# Altium PCB FPv3.1.PcbDoc
Units mil, origin at the board's own origin, x right, y up, seen from the top; angles counter-clockwise.
Board outline 1358 x 671 mil, 2 copper layers (Top Layer, Bottom Layer); 31 components, 75 nets, 237 pads, 44 vias.
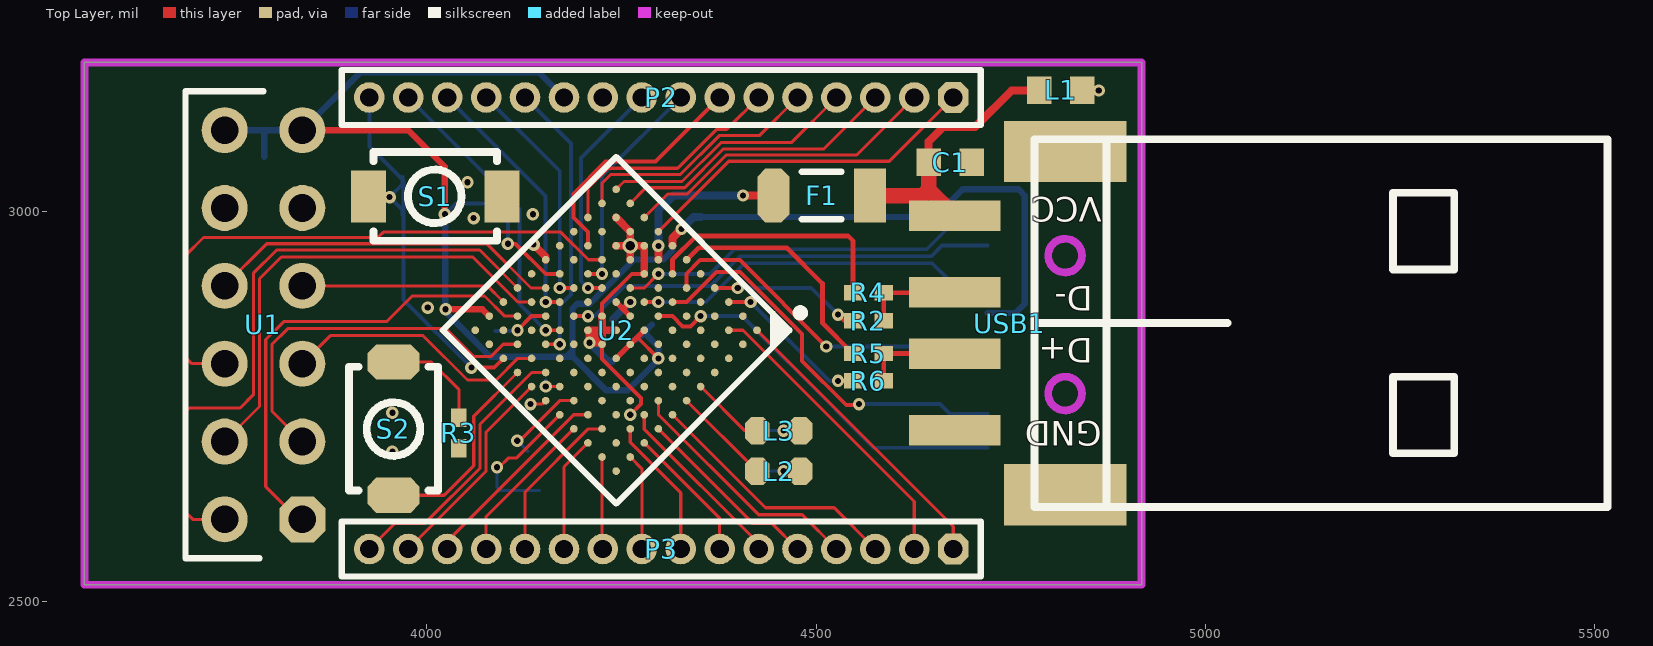
[diagram p0: Top Layer view]
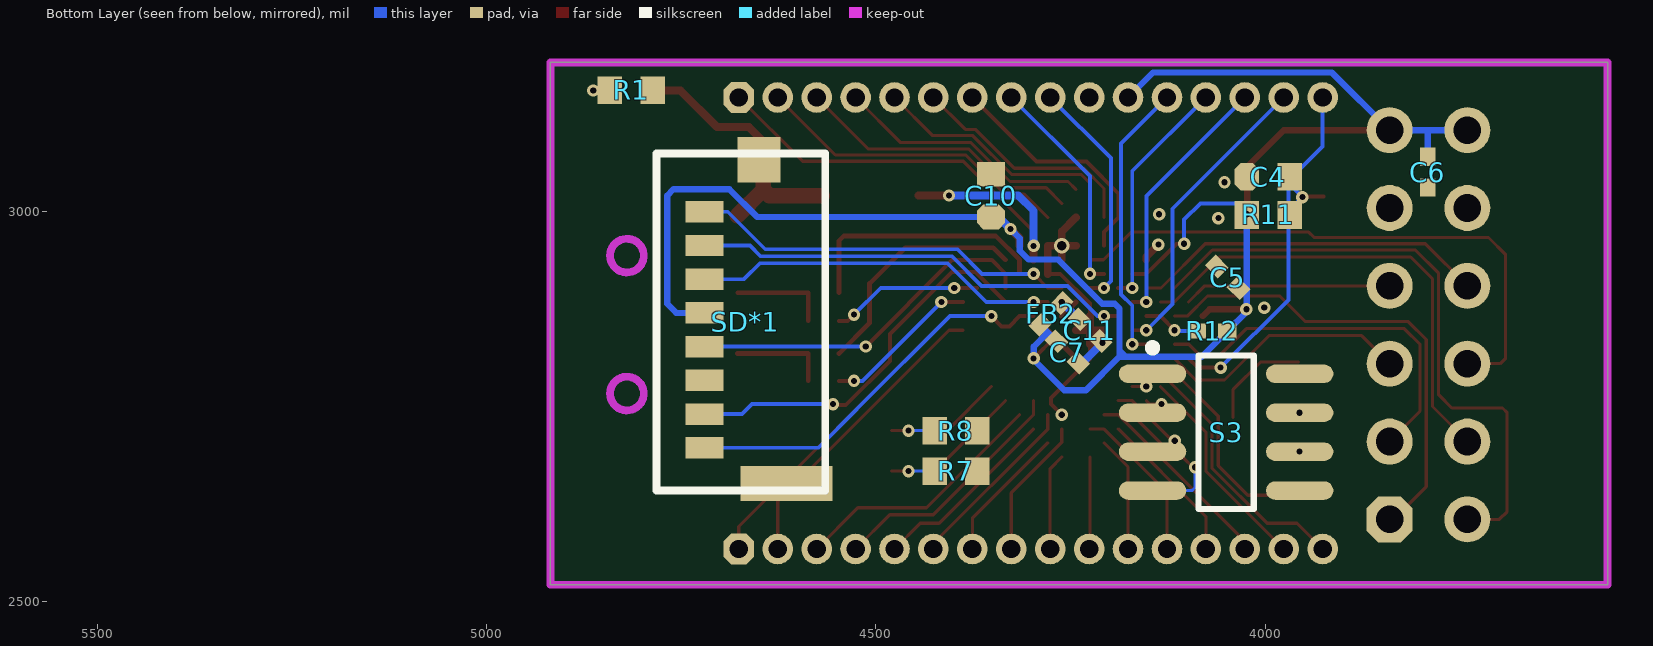
[diagram p1: Bottom Layer view, seen from below]

## Layer stack, top to bottom
Top Layer: signal copper 1.4
Dielectric: core 12.6, FR-4, Dk 4.8
Bottom Layer: signal copper 1.4

## Board outline
3560,2521 3560,3192 4918,3192 4918,2521

## Design rules (kind name [scope] priority, off if disabled: settings)
Clearance [All] p1: gap=4
DiffPairsRouting [All] p1: maxlimit=10 minlimit=10 mostfreqgap=10 maxuncoupledlength=500
PolygonConnect [All] p1: connectstyle=Direct reliefconductorwidth=10 reliefentries=4 polygonreliefangle="90 Angle" airgapwidth=10
RoutingVias [All] p1: holewidth=28 width=50 viastyle="Through Hole" minholewidth=28 minwidth=50 maxholewidth=28 maxwidth=50
SolderMaskExpansion [All] p1: expansion=4
Width [All] p1: maxlimit=50 minlimit=4 preferedwidth=10 minimp=50.000000 maximp=50.000000 favimp=50.000000
27 further rules are at their usual default settings.

## Classes and differential pairs
differential pair USB1D: +USB1D_P -USB1D_N

## Components (designator, comment, footprint, x,y, rotation, side; value= is the part's Value field where it differs from the comment)
C1 "Cap" 1608[0603]#1 4672,3064 r180 top
C4 "Cap" 1608[0603]#2 3996,3045 r180 bottom
C5 "Cap" 0402 4048,2916 r225 bottom
C6 "Cap" 0402 3791,3051 r90 bottom
C7 "Cap" 0402 4254,2820 r45 bottom
C10 "Cap" 1608[0603]#3 4352,3021 r270 bottom
C11 "Cap" 0402 4224.9,2848 r225 bottom
F1 "300-500mA" 1206(2) 4507,3021 r180 top
FB2 "Inductor" 0402 4275,2869 r135 bottom
L1 "LED" 1608[0603]#1 4814,3156 r0 top
L2 "LED" 1608[0603]#4 4452,2667 r0 top
L3 "LED" 1608[0603]#4 4452,2719 r0 top
P2 "MHDR1X16" MHDR1X16 4676,3147 r180 top
P3 "MHDR1X16" MHDR1X16 4676,2567 r180 top
R1 "Res" 1608[0603]#1 4814,3156 r0 bottom
R2 "Res" 0402 4567,2860 r0 top
R3 "Res" 0402 4041,2716 r270 top
R4 "Res" 0402 4567,2896 r0 top
R5 "Res" 0402 4567,2818 r0 top
R6 "Res" 0402 4567,2783 r180 top
R7 "Res" 1608[0603]#1 4397,2667 r0 bottom
R8 "Res" 1608[0603]#1 4397,2719 r0 bottom
R11 "Res" 1608[0603]#1 3996,2996 r180 bottom
R12 "Res" 0402 4068,2847 r0 bottom
S1 "SW-PB" "key 3*4*2"#1 4010,3020 r180 top
S2 "SW-PB" "key 3*4*2"#2 3957,2721 r270 top (schematic designator S1)
S3 "SW SMT-4" SO8_N 4050,2717 r180 bottom
SD*1 "TF_card" TF卡座(短体) 4565,2642 r90 bottom
U1 "Header 6X2" HDR2X6 3840,2605 r90 top
U2 "MK64FX512VDC" BGA121C65P11X11_800X800X50 4243,2848 r225 top
USB1 "USB_5line" USB-4-A-SMT-A 4678,2995 r180 top

## Footprints (in the part's own frame and the unit in brackets; to place one, negate y for a bottom-side part, rotate by r counter-clockwise, add the part's x,y. Pads: shape width x height; smd on the part's side, far side on the other; paste and mask are expansions set on the pad)
0402 [mm] "Chip Capacitor, Body 1.0x0.5mm, IPC High Density"
  rect 0.6x0.5 smd: 1(-0.5,0) 2(0.5,0)
  body extent -0.55,-0.3 0.55,0.3, height 1.3
1206(2) [mm]
  rect 1.05x1.75 smd: 1(-1.575,0)
  oct 1.05x1.75 smd: 2(1.575,0)
  silkscreen extent -0.65,-0.77 0.65,0.77, body extent -1.6,-0.8 1.6,0.8, height 1.6
1608[0603]#1 [mm] "Chip Capacitor, Body 1.6x0.8mm, IPC High Density"
  rect 0.8x0.9 smd: 1(-0.7,0) 2(0.7,0)
  body extent -0.87,-0.48 0.87,0.48, height 1.3
1608[0603]#2 [mm] "Chip Capacitor, Body 1.6x0.8mm, IPC High Density"
  oct 0.8x0.9 smd: 1(-0.7,0)
  rect 0.8x0.9 smd: 2(0.7,0)
  body extent -0.87,-0.48 0.87,0.48, height 1.3
1608[0603]#3 [mm] "Chip Capacitor, Body 1.6x0.8mm, IPC High Density"
  rect 0.8x0.9 smd: 1(-0.7,0)
  oct 0.8x0.9 smd: 2(0.7,0)
  body extent -0.87,-0.48 0.87,0.48, height 1.3
1608[0603]#4 [mm] "Chip Capacitor, Body 1.6x0.8mm, IPC High Density"
  oct 0.8x0.9 smd: 1(-0.7,0) 2(0.7,0)
  body extent -0.87,-0.48 0.87,0.48, height 1.3
BGA121C65P11X11_800X800X50 [mm] "BGA, 121-Leads, Body 8.00x8.00mmx0.50mm, Pitch 0.65mm"
  round 0.25 smd: A1(-3.25,3.25) A2(-2.6,3.25) A3(-1.95,3.25) A4(-1.3,3.25) A5(-0.65,3.25) A6(0,3.25) A7(0.65,3.25) A8(1.3,3.25) A9(1.95,3.25) A10(2.6,3.25) A11(3.25,3.25) B1(-3.25,2.6) B2(-2.6,2.6) B3(-1.95,2.6) B4(-1.3,2.6) B5(-0.65,2.6) B6(0,2.6) B7(0.65,2.6) B8(1.3,2.6) B9(1.95,2.6) B10(2.6,2.6) B11(3.25,2.6) C1(-3.25,1.95) C2(-2.6,1.95) C3(-1.95,1.95) C4(-1.3,1.95) C5(-0.65,1.95) C6(0,1.95) C7(0.65,1.95) C8(1.3,1.95) C9(1.95,1.95) C10(2.6,1.95) C11(3.25,1.95) D1(-3.25,1.3) D2(-2.6,1.3) D3(-1.95,1.3) D4(-1.3,1.3) D5(-0.65,1.3) D6(0,1.3) D7(0.65,1.3) D8(1.3,1.3) D9(1.95,1.3) D10(2.6,1.3) D11(3.25,1.3) E1(-3.25,0.65) E2(-2.6,0.65) E3(-1.95,0.65) E4(-1.3,0.65) E5(-0.65,0.65) E6(0,0.65) E7(0.65,0.65) E8(1.3,0.65) E9(1.95,0.65) E10(2.6,0.65) E11(3.25,0.65) F1(-3.25,0) F2(-2.6,0) F3(-1.95,0) F4(-1.3,0) F5(-0.65,0) F6(0,0) F7(0.65,0) F8(1.3,0) F9(1.95,0) F10(2.6,0) F11(3.25,0) G1(-3.25,-0.65) G2(-2.6,-0.65) G3(-1.95,-0.65) G4(-1.3,-0.65) G5(-0.65,-0.65) G6(0,-0.65) G7(0.65,-0.65) G8(1.3,-0.65) G9(1.95,-0.65) G10(2.6,-0.65) G11(3.25,-0.65) H1(-3.25,-1.3) H2(-2.6,-1.3) H3(-1.95,-1.3) H4(-1.3,-1.3) H5(-0.65,-1.3) H6(0,-1.3) H7(0.65,-1.3) H8(1.3,-1.3) H9(1.95,-1.3) H10(2.6,-1.3) H11(3.25,-1.3) J1(-3.25,-1.95) J2(-2.6,-1.95) J3(-1.95,-1.95) J4(-1.3,-1.95) J5(-0.65,-1.95) J6(0,-1.95) J7(0.65,-1.95) J8(1.3,-1.95) J9(1.95,-1.95) J10(2.6,-1.95) J11(3.25,-1.95) K1(-3.25,-2.6) K2(-2.6,-2.6) K3(-1.95,-2.6) K4(-1.3,-2.6) K5(-0.65,-2.6) K6(0,-2.6) K7(0.65,-2.6) K8(1.3,-2.6) K9(1.95,-2.6) K10(2.6,-2.6) K11(3.25,-2.6) L1(-3.25,-3.25) L2(-2.6,-3.25) L3(-1.95,-3.25) L4(-1.3,-3.25) L5(-0.65,-3.25) L6(0,-3.25) L7(0.65,-3.25) L8(1.3,-3.25) L9(1.95,-3.25) L10(2.6,-3.25) L11(3.25,-3.25)
  silkscreen extent -4.77,-4 4,4, body extent -4,-4 4,4, height 0.5
HDR2X6 [mm] "Connector; Header; 6x2 Position"
  oct 1.5x1.5 hole 0.9: 1(0,0)
  round 1.5 hole 0.9: 2(0,2.54) 3(2.54,0) 4(2.54,2.54) 5(5.08,0) 6(5.08,2.54) 7(7.62,0) 8(7.62,2.54) 9(10.16,0) 10(10.16,2.54) 11(12.7,0) 12(12.7,2.54)
  silkscreen extent -1.27,1.27 13.97,3.81, body extent -1.27,-1.27 13.97,3.81, height 7.58
"key 3*4*2"#1 [mm]
  rect 1.15x1.7 smd: 1(-2.191,0) 2(2.159,0)
  silkscreen extent -2.03,-1.45 2,1.45
"key 3*4*2"#2 [mm]
  oct 1.15x1.7 smd: 1(-2.191,0) 2(2.159,0)
  silkscreen extent -2.03,-1.45 2,1.45
MHDR1X16 [mm] "Connector; Header; 16 Position"
  oct 1x1 hole 0.6: 1(0,0)
  round 1 hole 0.6: 2(1.27,0) 3(2.54,0) 4(3.81,0) 5(5.08,0) 6(6.35,0) 7(7.62,0) 8(8.89,0) 9(10.16,0) 10(11.43,0) 11(12.7,0) 12(13.97,0) 13(15.24,0) 14(16.51,0) 15(17.78,0) 16(19.05,0)
  silkscreen extent -0.9,-0.9 19.95,0.9
SO8_N [mm] "SOIC, 8-Leads, Body 4.9x3.9mm, Pitch 1.27mm, IPC Medium Density"
  oval 2.2x0.6 smd: 1(-2.4,1.905) 2(-2.4,0.635) 3(-2.4,-0.635) 4(-2.4,-1.905) 5(2.4,-1.905) 6(2.4,-0.635) 7(2.4,0.635) 8(2.4,1.905)
  silkscreen extent -2.53,-2.5 0.9,2.88, body extent -2,-2.5 2,2.5, height 1.75
TF卡座(短体) [mm]
  rect 1.15x3 smd: 0(0.227,1.27)
  rect 1.48x1.4 smd: 0(10.795,2.159)
  rect 0.7x1.25 smd: 1(9.097,3.937) 2(7.997,3.937) 3(6.897,3.937) 4(5.797,3.937) 5(4.697,3.937) 6(3.597,3.937) 7(2.497,3.937) 8(1.397,3.937)
  silkscreen extent 0,0 11,5.5
USB-4-A-SMT-A [mm]
  rect 4x2 smd: 0(-3.6,9.1) 0(-3.6,-2.1)
  rect 3x1 smd: 1(0,0) 2(0,2.5) 3(0,4.5) 4(0,7)
  Keep-Out Layer circle w0.254: c-3.6,1.3 r0.55
  Keep-Out Layer circle w0.254: c-3.6,5.8 r0.55
  silkscreen extent -21.3,-2.5 -2.6,9.5

## Part data
C1 C4 C5 C6 C7 C10 C11: "贴片电容"
F1: library part "Fuse 1", "Fuse"
P2 P3: "Header, 16-Pin"
R1 R2 R3 R4 R5 R6 R7 R8 R11 R12: "贴片电阻"
S1 S2: "Switch"
S3: library part "SW DIP-4", "DIP Switch, 4 Position, SPST"
U1: "Header, 6-Pin, Dual row"

## Via types
v1: diameter 15.87, hole 7.87, Top Layer to Bottom Layer, tented both sides, 43 vias
v2: diameter 19.8, hole 11.81, Top Layer to Bottom Layer, tented both sides, 1 vias

## Nets (pads, with @x,y where several pads share a name; then routed paths per layer and width w, separated by ;. In a path a pad name is that pad's centre, name@x,y a point inside that pad or via, vN(x,y) a via of type N, cw(c..) or ccw(c..) an arc to the next point about the centre after c; other vN are vias at no path point)
3.3V: C5.2 C6.2 C7.2 C10.2 FB2.1 P2.11 R11.1 R12.1 SD*1.4 U1.11 U1.12 U2.E5 U2.E6 U2.E7 U2.G1 U2.K6 U2.L10 | length 2612.1
  Top Layer w5: v1(4104,2959) 4114,2959 4152.62,2920.38 U2.K6 ; 4270.19,2839 v1@4297.29,2811.9
  Top Layer w7: U2.E7 U2.E6 4270.19,2839 U2.E5
  Top Layer w8: U1.11 3976,3105 4023,3058 v1(4023,2997) ; v1(4024,2875) 4071.24,2875 U2.L10
  Top Layer w10: U2.G1 4315.38,2966.38 v1(4327,2978)
  Bottom Layer w5: v1(4023,2997) 4037,3011 4083,3011 4104,2990 v1(4104,2959)
  Bottom Layer w7: C7.2@4265.92,2835.92 C7.2@4269.76,2835.92
  Bottom Layer w8: U1.12 U1.11 3914,3179 4144,3179 P2.11 ; C6.2 3791,3104 ; v1@4023.56,2875.44 R11.1 ; v1(4024,2875) 4024,2871.31 R12.1 4081.34,2813.97 4179,2813.97 ; C7.2@4269.76,2835.92 4278.92,2845.08 ; FB2.1 4278.92,2845.08 ; v1(4327,2978) 4315,2966 4315,2950 4303.67,2938.67 4265.73,2938.67 4209.09,2882.03 4193.03,2882.03 4187.03,2876.03 4187.03,2822 ; C10.2 4652.44,2993.44 4688,3029 4760,3029 4768,3021 4768,2882 4756.23,2870.23 SD*1.4 ; 4179,2813.97 4187.03,2813.97 ; 4179,2813.97 4187.03,2822 ; 4187.03,2813.97 4187.03,2822 ; 4187.03,2813.97 4230,2771 4258,2771 4297,2810 4297,2827 4278.92,2845.08
  Bottom Layer w10: v1(4327,2978) 4342.44,2993.44 C10.2
  other v1: 4297.29,2811.81
5V: F1.2 U2.G2 | length 218.7
  Top Layer w10: U2.G2 v1(4297.29,2956.29) ; v1(4406,3021) F1.2
  Bottom Layer w10: v1(4297.29,2956.29) 4297.29,3001.29 4317,3021 v1(4406,3021)
ANALOG1: P2.4 U2.L1 | length 331.9
  Top Layer w4: U2.L1 4253.05,3039 4327.68,3039 4377.68,3089 4468,3089 P2.4
ANALOG2: P2.5 U2.L2 | length 322.7
  Top Layer w4: U2.L2 4224.9,3036.9 4236,3048 4325.36,3048 4375.36,3098 4427,3098 P2.5
ANALOG3: P2.6 U2.L3 | length 305
  Top Layer w4: U2.L3 4206.81,3030.12 4232.69,3056 4322.05,3056 4372.05,3106 4385,3106 P2.6
ANALOG4: P2.3 U2.K1 | length 371.3
  Top Layer w4: U2.K1 4281.24,3031 4330.99,3031 4380.99,3081 4510,3081 P2.3
ANALOG5: P2.2 U2.J1 | length 410.7
  Top Layer w4: U2.J1 4309.43,3023 4334.31,3023 4384.31,3073 4552,3073 P2.2
ANALOG6: P2.1 U2.H1 | length 450.1
  Top Layer w4: U2.H1 4387.62,3065 4594,3065 P2.1
ANALOG7: P2.7 U2.K4 | length 313.8
  Top Layer w5: U2.K4 4206.81,2974.19 4188,2993 4188,3023.33 4229.17,3064.5 4293.5,3064.5 P2.7
AVDD: C11.1 FB2.2 U2.F5 U2.G5 | length 69.8
  Top Layer w7: U2.G5 U2.F5 ; 4252.1,2875.19 v1(4261.1,2884.19)
  Bottom Layer w10: C11.1 v1(4261.1,2884.19)
GND: C1.1 C4.1 C5.1 C6.1 C7.1 C10.1 C11.2 P2.10 R1.1 R3.2 R7.1 R8.1 S1.1 S3.5 S3.6 S3.7 S3.8 SD*1.6 U1.9 U1.10 U2.F6 U2.F7 U2.G3 U2.G6 U2.G7 U2.H2 U2.H3 U2.J2 U2.J3 U2.K2 U2.K10 U2.L6 USB1.4 | length 526
  Top Layer w5: U2.F7 4224.9,2811.1 4275,2761 4275,2753.33 v1(4261.1,2739.43) ; U2.G6 4224.9,2882.25 4263.04,2920.38 U2.G3
  Top Layer w10: v1(4137,2958) 4152.52,2942.48 U2.L6 ; U2.G7 4224.9,2848 ; U2.G7@4208.78,2846.03 v1(4208.78,2831.87) ; U2.F7@4222.94,2831.87 v1(4208.78,2831.87) ; U2.F7 4224.9,2848 ; U2.G6 4224.9,2848 ; U2.F6 4224.9,2848 ; U2.J3 v2(4261.1,2956.57) ; U2.K2 U2.J2 v2(4261.1,2956.57) ; U2.H3 v2(4261.1,2956.57) ; U2.G3 U2.H2 v2(4261.1,2956.57) ; v1(4208.78,2831.87) 4224.9,2848
  Bottom Layer w10: v1(4208.78,2831.87) 4232.57,2808.08 C7.1@4238.08,2808.08
  other v1: 3955.51,2692 3955.51,2742 4001,2877 4060,2992 4136,2997 4052,3038
JTAG_TCK: P2.13 U2.J6 | length 302
  Top Layer w5: v1(4170.62,2902.29) U2.J6
  Bottom Layer w5: P2.13 4170.62,3052.38 v1(4170.62,2902.29)
JTAG_TDI: P2.15 U2.H8 | length 390.2
  Top Layer w5: v1(4152.52,2848) U2.H8
  Bottom Layer w5: P2.15 4119,3004 4119,2881.52 v1(4152.52,2848)
JTAG_TDO: P2.14 U2.J7 | length 333.3
  Top Layer w5: v1(4152.52,2884.19) U2.J7
  Bottom Layer w5: P2.14 4152.52,3020.48 v1(4152.52,2884.19)
JTAG_TMS: P2.12 U2.H9 | length 365.6
  Top Layer w5: U2.H9 v1(4170.62,2829.91)
  Bottom Layer w5: P2.12 4185.05,3087.95 4185.05,2894.05 4170.62,2879.62 v1(4170.62,2829.91)
N_RST: C4.2 P2.16 R11.2 S1.2 U2.J11 | length 536
  Top Layer w5: S1.2 v1@3951,3020 ; v1(4057,2800) 4086.43,2800 U2.J11
  Bottom Layer w5: P2.16 3926,3084 C4.2@3968.44,3041.56 ; R11.2 3968.44,3002.56 v1(3952,3019) 3968.44,3035.44 C4.2@3968.44,3041.56 ; C4.2 C4.2@3968.44,3041.56 ; v1(4057,2800) 3970,2887 3970,3040 C4.2@3968.44,3041.56
NetL1_2: L1.2 R1.2 | length 42.9
  Top Layer w4: L1.2 v1(4863,3156)
  Bottom Layer w4: R1.2 v1(4863,3156)
NetL2_2: L2.2 R7.2 | length 55
  Top Layer w4: v1(4458,2667) L2.2
  Bottom Layer w4: R7.2 v1(4458,2667)
NetL3_2: L3.2 R8.2 | length 55
  Top Layer w4: v1(4458,2719) L3.2
  Bottom Layer w4: R8.2 v1(4458,2719)
NetR2_2: R2.2 R4.2 USB1.2 | length 126.7
  Top Layer w6: R2.2 R4.2 USB1.2@4677.43,2896
NetR3_1: R3.1 S2.1 | length 134.9
  Top Layer w4: S2.1 4005.74,2807.26 4041,2772 R3.1
NetR5_2: R5.2 R6.1 USB1.3 | length 126.1
  Top Layer w6: R6.1 R5.2 USB1.3@4677.83,2818
NetR12_2: R12.2 U2.J8 | length 72.7
  Top Layer w5: v1(4116.33,2848) 4134.43,2866.1 U2.J8
  Bottom Layer w5: R12.2 4115.33,2847 v1(4116.33,2848)
PTA5: U1.8 U2.K7 | length 458.4
  Top Layer w4: U1.8 3794,2959 4077,2959 4133.71,2902.29 U2.K7
PTA11: U1.6 U2.J4 | length 745.5
  Top Layer w4: U1.6 3698,2805 3691,2812 3691,2945 3713,2967 3937,2967 3944,2974 4172,2974 4207.52,2938.48 U2.J4
PTA12: U1.4 U2.K8 | length 618.6
  Top Layer w4: U1.4@3740,2700 U1.4@3746,2700 ; U1.4 3785,2750 3785,2914 3813,2942 4059,2942 4116.81,2884.19 U2.K8
PTA13: U1.2 U2.L8 | length 807.6
  Top Layer w4: U1.2 3699,2605 3689,2615 3689,2742 3695,2748 3760,2748 3777,2765 3777,2921 3807,2951 4067.62,2951 U2.L8
PTA14: U1.1 U2.K9 | length 612.7
  Top Layer w4: U1.1@3840,2600 3793,2647 3793,2836 3816,2859 3948,2859 3981,2892 4074,2892 4099.9,2866.1 U2.K9
PTA15: U1.7 U2.L9 | length 266.9
  Top Layer w4: U1.7 4077.43,2905 U2.L9
PTA16: U1.3 U2.J10 | length 486.3
  Top Layer w4: U1.3 3801,2744 3801,2830 3821,2850 4024,2850 4060,2814 4082,2814 4097.9,2829.9 U2.J10
PTA17: U1.5 U2.H10 | length 344.5
  Top Layer w4: U1.5 3876,2841 3995,2841 4052,2784 4089,2784 4116.81,2811.81 U2.H10
PTA29: S2.2 U2.H11 | length 260.2
  Top Layer w4: S2.2@3958.62,2636 4022,2636 4060.07,2674.07 4060.07,2737.45 U2.H11
PTB0: P3.15 U2.G11 | length 274.2
  Top Layer w4: P3.15 4076.07,2667.07 4076.07,2717.26 U2.G11
PTB1: P3.16 U2.G10 | length 353.4
  Top Layer w4: P3.16 3959,2600 3997.31,2600 4068.07,2670.75 4068.07,2727.07 4134.71,2793.71 U2.G10
PTB6: S3.2 U2.F11 | length 21.9
  Top Layer w4: v1(4133,2753) 4148,2753 U2.F11
  Bottom Layer w4: v1(4133,2753) S3.2@4133.49,2753
PTB7: S3.4 U2.E11 | length 189.1
  Top Layer w4: v1@4092,2671 4105,2684 4115.19,2684 U2.E11
  Bottom Layer w4: v1(4090,2672) 4090,2646 4094,2642 S3.4
PTB8: P3.13 U2.D11 | length 201
  Top Layer w4: P3.13 4076,2608.62 U2.D11
PTB9: S3.3 U2.E10 | length 113.9
  Top Layer w4: v1(4116,2706) 4119,2706 4170.52,2757.52 U2.E10
  Bottom Layer w4: v1(4116,2706) S3.3@4130,2692
PTB10: P3.14 U2.D10 | length 258.1
  Top Layer w4: P3.14 4026,2577 4188.43,2739.43 U2.D10
PTB11: P3.12 U2.C10 | length 205.6
  Top Layer w4: P3.12 4126,2640 4207.33,2721.33 U2.C10
PTB12: P3.10 U2.B11 | length 118.6
  Top Layer w4: U2.B11 4224.9,2568.1 P3.10
PTB13: P3.11 U2.C11 | length 149
  Top Layer w4: P3.11 4176,2672.43 U2.C11
PTB20: S3.1 U2.F10 | length 26.3
  Top Layer w4: v1(4152.62,2775.62) U2.F10
  Bottom Layer w4: v1(4152.62,2775.62) S3.1@4152.62,2783.87
PTC0: P3.8 U2.B9 | length 181.2
  Top Layer w4: U2.B9 4261.1,2703.9 4326,2639 P3.8
PTC3: P3.6 U2.B8 | length 233.2
  Top Layer w4: U2.B8 4279.19,2720.81 4426,2574 P3.6
PTC4: P3.5 U2.A8 | length 242.6
  Top Layer w4: U2.A8 4418.62,2600 4443,2600 P3.5
PTC7: P3.4 U2.B7 | length 318.1
  Top Layer w4: U2.B7 4297.29,2739.71 4426,2611 4482,2611 P3.4
PTC8: P3.3 U2.A7 | length 332
  Top Layer w4: U2.A7 4434.81,2620 4523,2620 P3.3
PTC12: U2.B6
PTC13: L2.1 U2.A6 | length 128.3
  Top Layer w4: U2.A6 L2.1@4424.22,2666.78
PTC14: L3.1 U2.A5 | length 96.3
  Top Layer w4: U2.A5 4408.19,2719 L3.1
PTC15: U2.B5
PTC18: U2.B4
PTC19: U2.A4
PTD3: U2.B3
PTD4: U2.A3
PTD5: U2.A2
PTD6: P3.2 U2.B2 | length 390.4
  Top Layer w4: U2.B2 4406,2848 4626,2628 P3.2
PTD7: P3.1 U2.A1 | length 385.4
  Top Layer w4: U2.A1 4676,2595.95 P3.1
PTD8: P3.9 U2.A10 | length 124.3
  Top Layer w4: U2.A10 4276,2670.24 P3.9
PTD9: P3.7 U2.A9 | length 176.3
  Top Layer w4: U2.A9 4376,2606.43 P3.7
PTD10: U2.B1
PTD12: R6.2 U2.C1 | length 201.5
  Top Layer w5: U2.C1 v1(4415.81,2884.19) ; v1(4528,2783) R6.2
  Bottom Layer w5: v1(4415.81,2884.19) 4517,2783 v1(4528,2783)
PTD14: R2.1 U2.D1 | length 195.2
  Top Layer w5: U2.D1 v1(4399.29,2902.29) ; v1(4528,2868) 4536,2860 R2.1
  Bottom Layer w5: v1(4399.29,2902.29) 4493.71,2902.29 v1(4528,2868)
PTE0: SD*1.8 U2.E4 | length 503.8
  Top Layer w5: U2.E4 4315.38,2866.1 4328.48,2853 4338.48,2853 v1(4351.57,2866.1)
  Bottom Layer w5: v1(4351.57,2866.1) 4404.9,2866.1 4524.57,2746.43 4524.57,2746.02 4573.59,2697 SD*1.8
PTE1: SD*1.7 U2.E3 | length 517.4
  Top Layer w5: U2.E3 4333.19,2884.19 4372,2923 4402,2923 4482,2843 4482,2808.59 4538.59,2752 4554,2752 v1(4555,2753)
  Bottom Layer w5: v1(4555,2753) 4659,2753 4671.69,2740.31 SD*1.7
PTE2: SD*1.5 U2.E2 | length 459.4
  Top Layer w5: U2.E2 4333.48,2920.48 4351,2938 4402,2938 v1@4514,2826
  Bottom Layer w5: v1@4513,2826.92 SD*1.5
  other v1: 4513,2827
PTE3: SD*1.3 U2.F4 | length 469.9
  Top Layer w5: U2.F4 v1(4297.29,2884.19)
  Bottom Layer w5: v1(4297.29,2884.19) 4358.19,2884.19 4408,2934 4649,2934 4669.46,2913.54 SD*1.3
PTE4: SD*1.2 U2.H7 | length 568.9
  Top Layer w5: U2.H7 v1(4206.81,2866.09)
  Bottom Layer w5: v1(4206.81,2866.09) 4215.1,2866.09 4254,2905 4364,2905 4402,2943 4648,2943 4661.84,2956.84 SD*1.2
PTE5: SD*1.1 U2.G4 | length 499.6
  Top Layer w4: U2.G4@4261,2902.38 U2.G4 4279.19,2902.29 v1(4297.29,2920.38)
  Bottom Layer w5: v1(4297.29,2920.38) 4363.38,2920.38 4395,2952 4642,2952 4690.15,3000.15 SD*1.1
PTE24: P2.9 U2.H5 | length 298.8
  Top Layer w5: v1(4206.81,2902.29) U2.H5
  Bottom Layer w5: v1(4206.81,2902.29) 4198,2911.1 4198,3069 P2.9
PTE25: P2.8 U2.J5 | length 286.6
  Top Layer w5: U2.J5 v1(4224.9,2920.38)
  Bottom Layer w5: v1(4224.9,2920.38) 4224.9,3045.9 P2.8
USB1D_N: R4.1 U2.F2 | length 331.9
  Top Layer w6: U2.F2 4315.38,2938.38 4346,2969 4541,2969 4547.31,2962.68 R4.1
USB1D_P: R5.1 U2.F1 | length 306.3
  Top Layer w6: U2.F1 4349,2954 4462,2954 4508,2908 4508,2857.32 R5.1
VCC: C1.2 F1.1 L1.1 USB1.1 | length 357.1
  Top Layer w10: C1.2 4644.44,3090.44 4663,3109 4704,3109 4751,3156 L1.1
  Top Layer w20: F1.1 4636.88,3021 4644.44,3028.56 ; C1.2 4644.44,3028.56 ; USB1.1 4644.44,3028.56
pads on no net: SD*1.0 U2.A11 U2.B10 U2.C2 U2.C3 U2.C4 U2.C5 U2.C6 U2.C7 U2.C8 U2.C9 U2.D2 U2.D3 U2.D4 U2.D5 U2.D6 U2.D7 U2.D8 U2.D9 U2.E1 U2.E8 U2.E9 U2.F3 U2.F8 U2.F9 U2.G8 U2.G9 U2.H4 U2.H6 U2.J9 U2.K3 U2.K5 U2.K11 U2.L4 U2.L5 U2.L7 U2.L11 USB1.0

## Keep-outs
Keep-Out Layer:
  the board outline again, w10

## Text inside footprints (layer, text, board x,y; h text height)
USB1: Top Overlay "VCC" at 4866.98,3018.62 h31.5 r180; Top Overlay "GND" at 4866.98,2731.22 h31.5 r180; Top Overlay "D-" at 4855.17,2904.45 h31.5 r180; Top Overlay "D+" at 4855.17,2837.52 h31.5 r180